# EAGLE board SVD01 (EAGLE 4.09)

Size 100 x 80 mm. Coordinates in mm from the lower left corner, seen from the top.
Outline: 0,0 100,0 100,80 0,80 0,0
Copper layers used: 

## Footprints (pad centres in the part's own frame; a part is rotated, then mirrored left to right if it is on the bottom)
BATTERY = drill 1.016 long: + 9.525,-5.08; +@1 9.525,5.08; - -5.715,0
C050-024X044 = drill 0.813 octagon: 1 -2.54,0; 2 2.54,0
C2.5-3 = drill 0.813 pad 1.6 octagon: 1 -1.27,0; 2 1.27,0
DO41-10 = drill 1.118 long: A 5.08,0; C -5.08,0
DIL14 = drill 0.8 offset: 1 -7.62,-3.81; 2 -5.08,-3.81; 3 -2.54,-3.81; 4 0,-3.81; 5 2.54,-3.81; 6 5.08,-3.81; 7 7.62,-3.81; 8 7.62,3.81; 9 5.08,3.81; 10 2.54,3.81; 11 0,3.81; 12 -2.54,3.81; 13 -5.08,3.81; 14 -7.62,3.81
TO92 = drill 0.813 octagon: 1 -1.27,0; 2 0,1.905; 3 1.27,0
LED5MM = drill 0.813 octagon: A -1.27,0; K 1.27,0
MOTOR = drill 0.813 long: P$1 -17.78,7.62; P$2 6.35,7.62
QS = drill 0.61 offset: 1 -2.54,0; 2 2.54,0
0207/10 = drill 0.813 octagon: 1 -5.08,0; 2 5.08,0
0204/7 = drill 0.813 octagon: 1 -3.81,0; 2 3.81,0
0411V = drill 0.914 octagon: 1 -2.54,0; 2 1.27,0
RTRIM4G/J = smd 1.3 x 1.3: 1 -1.15,-2.75; 3 1.15,-2.75 | smd 2 x 1.3: 2 0,2.75
0922/22 = drill 1.016 octagon: 1 -11.43,0; 2 11.43,0
0207/7 = drill 0.813 octagon: 1 -3.81,0; 2 3.81,0
EDG-04 = drill 0.813 offset: 1 -3.81,-3.81; 2 -1.27,-3.81; 3 1.27,-3.81; 4 3.81,-3.81; 5 3.81,3.81; 6 1.27,3.81; 7 -1.27,3.81; 8 -3.81,3.81
DIL28-3 = drill 0.813 offset: 1 -16.51,-3.81; 2 -13.97,-3.81; 3 -11.43,-3.81; 4 -8.89,-3.81; 5 -6.35,-3.81; 6 -3.81,-3.81; 7 -1.27,-3.81; 8 1.27,-3.81; 9 3.81,-3.81; 10 6.35,-3.81; 11 8.89,-3.81; 12 11.43,-3.81; 13 13.97,-3.81; 14 16.51,-3.81; 15 16.51,3.81; 16 13.97,3.81; 17 11.43,3.81; 18 8.89,3.81; 19 6.35,3.81; 20 3.81,3.81; 21 1.27,3.81; 22 -1.27,3.81; 23 -3.81,3.81; 24 -6.35,3.81; 25 -8.89,3.81; 26 -11.43,3.81; 27 -13.97,3.81; 28 -16.51,3.81
TC4422 = drill 0.813 round: P$1 -10.16,5.08; P$2 -10.16,2.54; P$3 -10.16,0; P$4 -10.16,-2.54; P$5 -10.16,-5.08
DIL08 = drill 0.813 offset: 1 -3.81,-3.81; 2 -1.27,-3.81; 3 1.27,-3.81; 4 3.81,-3.81; 5 3.81,3.81; 6 1.27,3.81; 7 -1.27,3.81; 8 -3.81,3.81

## Placement (x,y rotation side)
BAT1  5v  [BATTERY]  -26.2,43.81 0 top  (outside the outline)
BAT2  12v  [BATTERY]  -108.75,-125.1 0 top  (outside the outline)
C2  15pF  [C050-024X044]  -33.82,5.71 0 top  (outside the outline)
C3  15pF  [C050-024X044]  -19.85,17.14 0 top  (outside the outline)
C4  100nF  [C2.5-3]  -47.79,22.22 0 top  (outside the outline)
D1  1N4007  [DO41-10]  -111.29,-45.09 0 top  (outside the outline)
D2  1N4007  [DO41-10]  -111.29,-52.71 0 top  (outside the outline)
D3  1N4007  [DO41-10]  -111.29,-60.33 0 top  (outside the outline)
D4  1N4007  [DO41-10]  -111.29,-67.95 0 top  (outside the outline)
D5  1N4007  [DO41-10]  -111.29,-75.57 0 top  (outside the outline)
D6  1N4007  [DO41-10]  -111.29,-83.19 0 top  (outside the outline)
IC1  74LS14N  [DIL14]  -41.44,74.29 0 top  (outside the outline)
IC2  LM35  [TO92]  -92.24,86.99 0 top  (outside the outline)
LD1  [LED5MM]  -23.66,86.99 0 top  (outside the outline)
LD2  [LED5MM]  -41.44,86.99 0 top  (outside the outline)
MOTOR  MOTOR  [MOTOR]  -79.54,-13.34 0 top  (outside the outline)
Q1  4MHz  [QS]  -19.85,5.71 0 top  (outside the outline)
R1  470ohm  [0207/10]  -93.51,14.6 0 top  (outside the outline)
R2  1K  [0204/7]  -21.12,26.03 0 top  (outside the outline)
R3  1K  [0411V]  -90.97,5.71 0 top  (outside the outline)
R4  1K  [0411V]  -19.85,60.32 0 top  (outside the outline)
R5  470ohm  [0207/10]  -93.51,23.49 0 top  (outside the outline)
R6  470ohm  [0207/10]  -93.51,33.65 0 top  (outside the outline)
R7  470ohm  [0207/10]  -93.51,42.54 0 top  (outside the outline)
R8  100k  [RTRIM4G/J]  -60.49,73.02 0 top  (outside the outline)
R9  1ohm  [0922/22]  -82.08,71.75 0 top  (outside the outline)
R10  330ohm  [0207/7]  -55.41,86.99 0 top  (outside the outline)
R11  330ohm  [0207/7]  -71.92,86.99 0 top  (outside the outline)
SW1  [EDG-04]  -21.12,74.29 0 top  (outside the outline)
U1  PIC16F876SP  [DIL28-3]  -61.76,9.52 0 top  (outside the outline)
U$1  TC4422  [TC4422]  -98.59,-15.88 0 top  (outside the outline)
U$2  TC4422  [TC4422]  -108.75,-15.88 0 top  (outside the outline)
U$3  [DIL08]  -113.83,-33.66 0 top  (outside the outline)
U$4  MOTOR  [MOTOR]  -99.86,-99.7 0 top  (outside the outline)

## Library data of the parts
BAT1 BAT2 Q1 SW1 = special
C2 C3 R1-R11 = rcl
C4 = capacitor-wima
D1-D6 = diode
IC1 = 74xx-eu
IC2 = linear
LD1 LD2 = led
MOTOR U$1-U$4 = Otros
U1 = pic16f87x

## Nets
+: BAT2.+
GND: IC1.7
N$1: R4.2 U1.14
N$2: R1.1 SW1.1 U1.23
N$3: R5.1 SW1.2 U1.24
N$4: R6.1 SW1.3 U1.25
N$5: R7.1 SW1.4 U1.26
N$6: IC1.11 IC1.12
N$7: IC1.1 IC1.8
N$8: IC1.4 IC1.5
N$9: IC1.3
N$10: IC1.9 U1.21
N$11: D1.A D2.C
N$12: D3.A D4.C MOTOR.P$2
N$13: R8.2
N$15: D2.A D4.A R9.1 U$2.P$4 U$2.P$5
N$16: R11.2
N$17: R10.2
N$18: LD1.A R11.1
N$19: LD2.A R10.1
N$20: C2.2 Q1.2 U1.9
N$21: R2.2 U1.1
N$22: BAT1.+ BAT1.+@1 C4.2 IC2.1 R2.1 R3.1 R4.1 R8.3 SW1.5 SW1.6 SW1.7 SW1.8 U1.20
N$24: D5.A IC1.6
N$25: C3.2 Q1.1 U1.10
N$26: IC2.3
N$27: D6.A IC1.2
N$28: D6.C U$2.P$1
N$29: D5.C
N$30: U$3.7 U$4.P$2
N$31: BAT2.+@1 D1.C D3.C U$2.P$3 U$3.8
N$32: IC1.10 U$3.3
N$42: R3.2 U1.15
VCC: IC1.14
VSS2: BAT1.- BAT2.- C2.1 C3.1 C4.1 IC2.2 LD1.K LD2.K R1.2 R5.2 R8.1 R9.2 U1.8 U1.19 U$3.1

## Tracks (layer width: path | path; a pad name or v marks a point on that pad's centre or on a via)
N$1  (1 unrouted)
N$2  (2 unrouted)
N$3  (2 unrouted)
N$4  (2 unrouted)
N$5  (2 unrouted)
N$6  (1 unrouted)
N$7  (1 unrouted)
N$8  (1 unrouted)
N$10  (1 unrouted)
N$11  (1 unrouted)
N$12  (2 unrouted)
N$15  (4 unrouted)
N$18  (1 unrouted)
N$19  (1 unrouted)
N$20  (2 unrouted)
N$21  (1 unrouted)
N$22  (12 unrouted)
N$24  (1 unrouted)
N$25  (2 unrouted)
N$27  (1 unrouted)
N$28  (1 unrouted)
N$30  (1 unrouted)
N$31  (4 unrouted)
N$32  (1 unrouted)
N$42  (1 unrouted)
VSS2  (14 unrouted)